# Altium PCB PCB.PcbDoc
Units mm, origin at the board's own origin, x right, y up, seen from the top; angles counter-clockwise.
Board outline 80 x 60 mm, 2 copper layers (Top Layer, Bottom Layer), stack 1.671 mm thick; 9 components, 7 nets, 24 pads, 2 vias.
Unrouted connection lines stored in the file: 1.
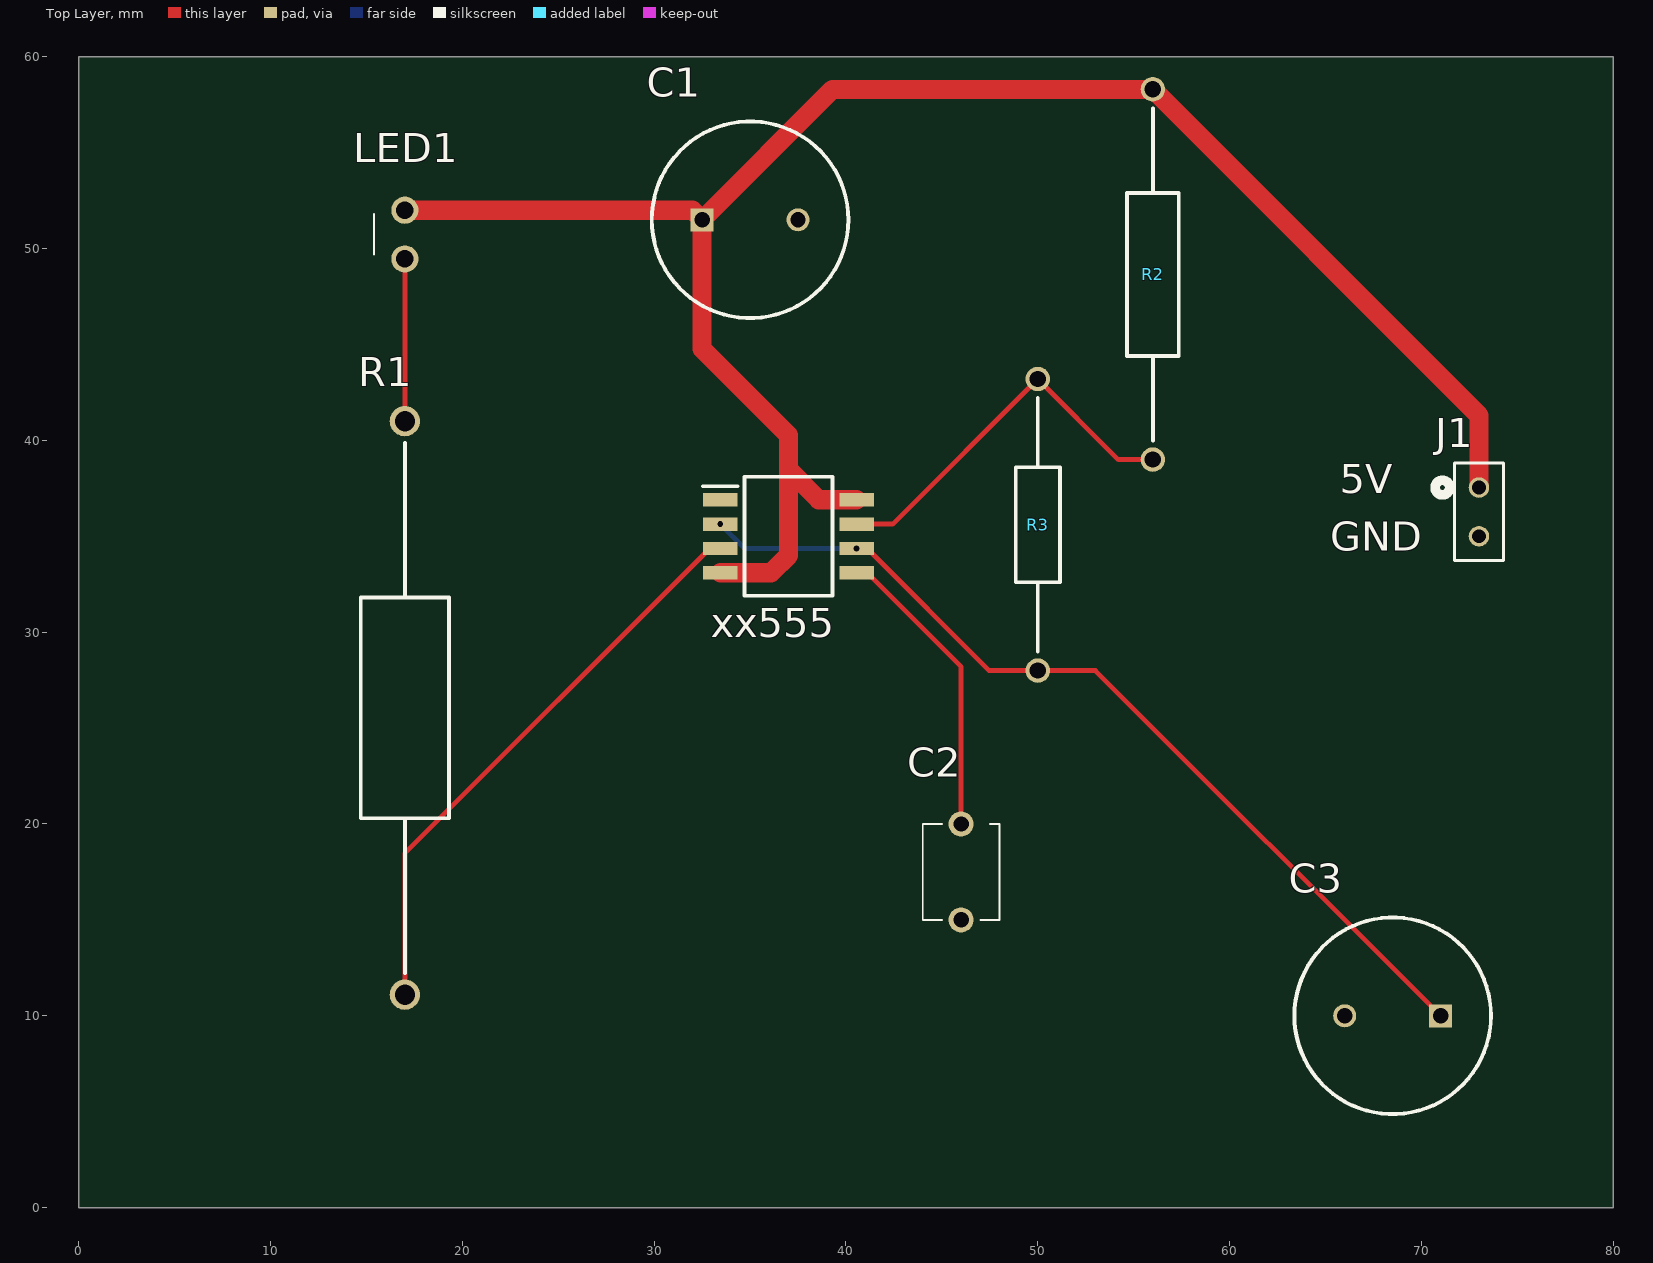
[diagram p0: Top Layer view]
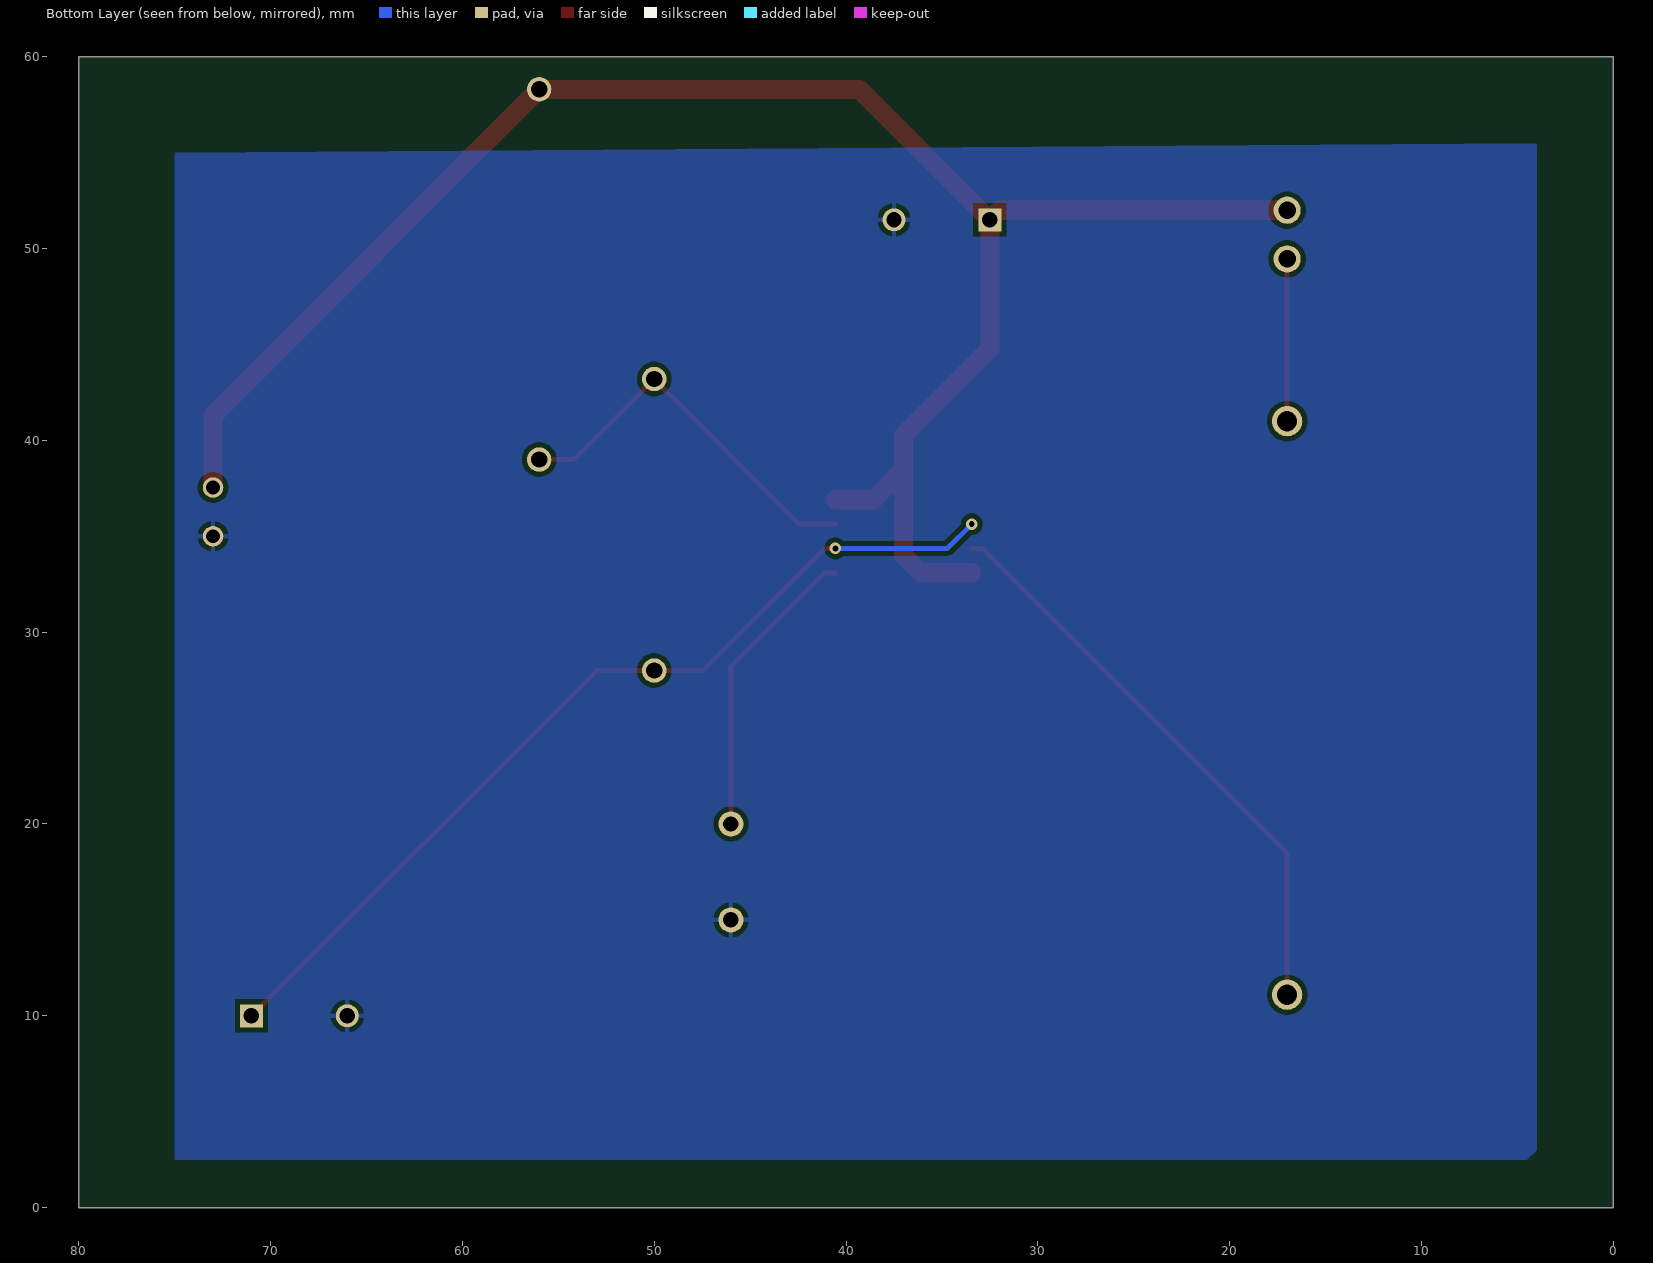
[diagram p1: Bottom Layer view, seen from below]
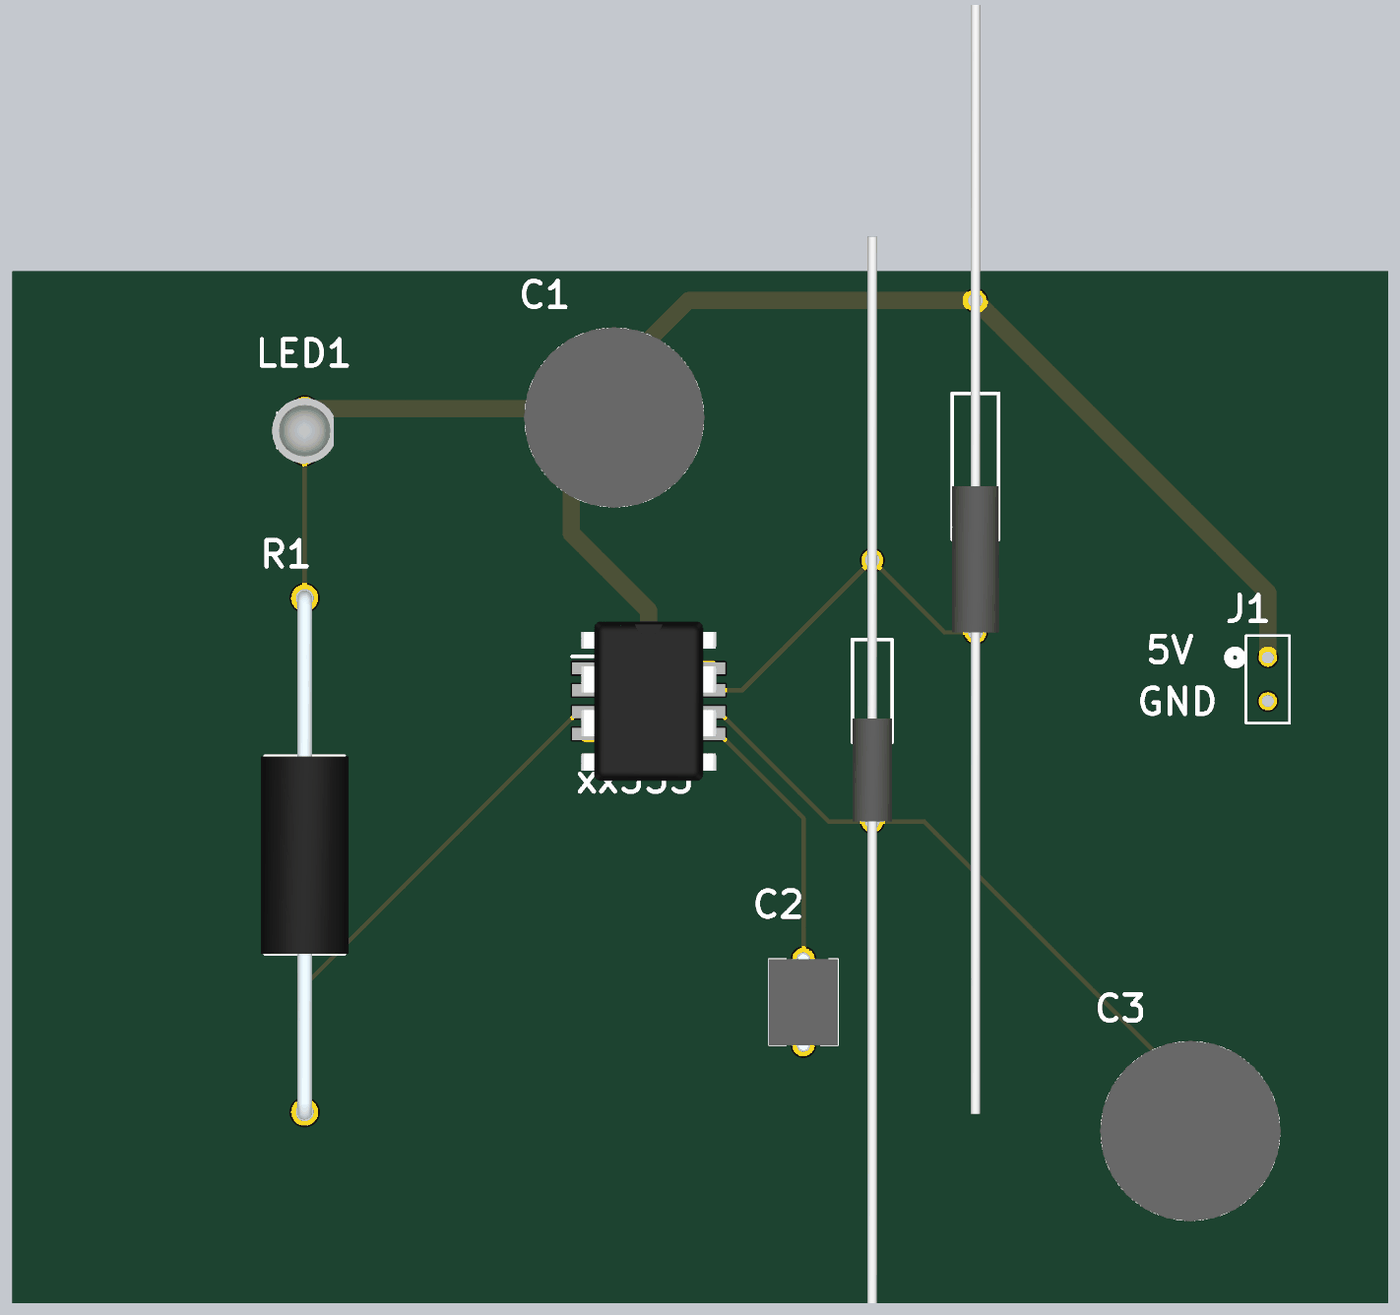
[diagram p2: 3D render of the assembled board from above, using the file's embedded part models]

## Layer stack, top to bottom
Top Solder: solder mask 0.0102, Solder Resist, Dk 3.5
Top Layer: signal copper 0.0356
Dielectric 1: dielectric 1.6, FR-4, Dk 4.8
Bottom Layer: signal copper 0.0356
Bottom Solder: solder mask 0.0102, Solder Resist, Dk 3.5

## Board outline
0,60 0,0 80,0 80,60

## Design rules (kind name [scope] priority, off if disabled: settings)
Clearance [All] p1: gap=0.254 ignorepadtopadclearanceinfootprint=FALSE except(0: Arc-Hole Track-Hole SMDPad-Hole THPad-Hole Via-Hole Fill-Hole Poly-Hole Region-Hole Text-Hole)
PolygonConnect [All] p1: connectstyle=Relief reliefconductorwidth=0.254 reliefentries=4 polygonreliefangle="90 Angle" airgapwidth=0.254
RoutingVias [All] p1: holewidth=0.711 width=1.27 viastyle="Through Hole" minholewidth=0.711 minwidth=1.27 maxholewidth=0.711 maxwidth=1.27
SolderMaskExpansion [All] p1: expansion=0.102 istentingtop=FALSE
Width [All] p1: maxlimit=0.254 minlimit=0.254 preferedwidth=0.254
30 further rules are at their usual default settings.

## Components (designator, comment, footprint, x,y, rotation, side; value= is the part's Value field where it differs from the comment)
C1 "UCS2G100MPD1TD" CAPPRD500W60D1025H2150 32.5,51.5 r0 top
C2 "D102K20Y5PH63J5R" D102K20Y5PH63J5R 46,15 r90 top
C3 "UCS2G100MPD1TD" CAPPRD500W60D1025H2150 71,10 r180 top
J1 "TS-102-T-A" SAMTEC_TS-102-T-A 73,37.54 r270 top
LED1 "1254-10SURT_S530-A3" 125410SURTS530A3 17,52 r270 top
R1 "PNP300JR-73-100R" RESAD2990W85L1150D460 17,11.1 r90 top
R2 "CF12JT1K00" RESAD1930W63L850D270 56,39 r90 top
R3 "CF14JT22K0" RESAD1520W63L600D230 50,28 r90 top
xx555 "NE555PSRE4" SOIC127P780X200-8N 37,35 r0 top

## Footprints (in the part's own frame and the unit in brackets; to place one, negate y for a bottom-side part, rotate by r counter-clockwise, add the part's x,y. Pads: shape width x height; smd on the part's side, far side on the other; paste and mask are expansions set on the pad)
125410SURTS530A3 [mm]
  round 1.416 hole 0.91: 1(0,0) 2(2.54,0)
  silkscreen extent 0.2,-1.6 2.3,-1.6, body extent -0.63,-1.9 3.17,1.7, height 5.28
CAPPRD500W60D1025H2150 [mm]
  rect 1.2x1.2 hole 0.8: 1(0,0)
  round 1.2 hole 0.8: 2(5,0)
  silkscreen extent -2.63,-5.12 7.63,5.12, body extent -2.75,-5.24 7.75,5.24, height 21.5
D102K20Y5PH63J5R [mm]
  round 1.3 hole 0.8: 1(0,0) 2(5,0)
  silkscreen extent 0,-2 5,2, body extent -0.3,-2 5.3,2, height 9.1
RESAD1520W63L600D230 [mm]
  round 1.275 hole 0.85: 1(0,0) 2(15.2,0)
  silkscreen extent 0.99,-1.15 14.21,1.15, body extent -28,-1.15 34,1.15, height 1.14
RESAD1930W63L850D270 [mm]
  round 1.275 hole 0.85: 1(0,0) 2(19.3,0)
  silkscreen extent 0.99,-1.35 18.31,1.35, body extent -28,-1.35 36.5,1.35, height 1.34
RESAD2990W85L1150D460 [mm]
  round 1.575 hole 1.05: 1(0,0) 2(29.9,0)
  silkscreen extent 1.14,-2.3 28.76,2.3, body extent -0.43,-2.55 30.32,2.55, height 5.1
SAMTEC_TS-102-T-A [mil]
  round 42 hole 28: 1(0,0) 2(100,0)
  silkscreen extent -50,-90 150,50
SOIC127P780X200-8N [mm]
  rect 1.8x0.7 smd: 1(-3.55,1.905) 2(-3.55,0.635) 3(-3.55,-0.635) 4(-3.55,-1.905) 5(3.55,-1.905) 6(3.55,-0.635) 7(3.55,0.635) 8(3.55,1.905)
  silkscreen extent -4.45,-3.1 2.3,3.1, body extent -4.1,-4.64 4.1,4.64, height 4.21

## Part data
C1 C3: "Capacitor Polarised", Manufacturer_Name=Nichicon, Mouser Part Number=647-UCS2G100MPD1TD, Arrow Part Number=UCS2G100MPD1TD, Arrow Price/Stock=https://www.arrow.com/en/products/ucs2g100mpd1td/nichicon, Datasheet Link=http://nichicon-us.com/english/products/pdfs/e-ucs.pdf, Height=21.5mm, Manufacturer_Part_Number=UCS2G100MPD1TD, Mouser Price/Stock=https://www.mouser.co.uk/ProductDetail/Nichicon/UCS2G100MPD1TD?qs=qJYTfuAnAfodP803qrfaZA%3D%3D
C2: "Capacitor", Manufacturer_Name=Vishay, Mouser Part Number=594-D102K20Y5PH63J5R, Arrow Part Number=D102K20Y5PH63J5R, Arrow Price/Stock=https://www.arrow.com/en/products/d102k20y5ph63j5r/vishay, Datasheet Link=https://componentsearchengine.com/Datasheets/2/D102K20Y5PH63J5R.pdf, Height=9mm, Manufacturer_Part_Number=D102K20Y5PH63J5R, Mouser Price/Stock=https://www.mouser.co.uk/ProductDetail/Vishay-BC-Components/D102K20Y5PH63J5R?qs=4byTeOu1NPHpy4BomGS2Ig%3D%3D
J1: "Connector", Manufacturer_Name=SAMTEC, Mouser Part Number=200-TS102TA, Arrow Part Number=TS-102-T-A, Arrow Price/Stock=https://www.arrow.com/en/products/ts-102-t-a/samtec?region=nac, Manufacturer_Part_Number=TS-102-T-A, Mouser Price/Stock=https://www.mouser.co.uk/ProductDetail/Samtec/TS-102-T-A?qs=0lQeLiL1qyYw%2F4U%252Bgf8JTQ%3D%3D
LED1: "LED", Arrow Part Number=1254-10SURT/S530-A3, Manufacturer_Name=Everlight, Arrow Price/Stock=https://www.arrow.com/en/products/1254-10surts530-a3/everlight-electronics?region=nac, Datasheet Link=https://datasheet.datasheetarchive.com/originals/distributors/Datasheets-3/DSA-55877.pdf, Height=5.2mm, Manufacturer_Part_Number=1254-10SURT/S530-A3
R1: "Resistor", Manufacturer_Name=KEMET, Mouser Part Number=603-PNP300JR-73-100R, Arrow Part Number=PNP300JR-73-100R, Arrow Price/Stock=https://www.arrow.com/en/products/pnp300jr-73-100r/yageo, Datasheet Link=https://www.yageo.com/upload/media/product/productsearch/datasheet/lr/YAGEO%20PNP_datasheet_2021v0.pdf, Manufacturer_Part_Number=PNP300JR-73-100R, Mouser Price/Stock=https://www.mouser.com/Search/Refine.aspx?Keyword=603-PNP300JR-73-100R
R2: "Resistor", Manufacturer_Name="Stackpole Electronics", Mouser Part Number=708-CF12JT1K00, Datasheet Link=https://cs.seielect.com/catalog/SEI-CF_CFM.pdf, Manufacturer_Part_Number=CF12JT1K00, Mouser Price/Stock=https://www.mouser.co.uk/ProductDetail/SEI-Stackpole/CF12JT1K00?qs=FESYatJ8odK%252BPjfs7xH%2FCA%3D%3D
R3: "Resistor", Manufacturer_Name="Stackpole Electronics", Arrow Part Number=CF14JT22K0, Arrow Price/Stock=https://www.arrow.com/en/products/cf14jt22k0/stackpole-electronics, Datasheet Link=https://cs.seielect.com/catalog/SEI-CF_CFM.pdf, Manufacturer_Part_Number=CF14JT22K0
xx555: "Integrated Circuit", Manufacturer_Name="Texas Instruments", Mouser Part Number=595-NE555PSRE4, Arrow Part Number=NE555PSRE4, Arrow Price/Stock=https://www.arrow.com/en/products/ne555psre4/texas-instruments, Datasheet Link=http://www.ti.com/lit/ds/symlink/ne555.pdf, Height=2mm, Manufacturer_Part_Number=NE555PSRE4, Mouser Price/Stock=https://www.mouser.co.uk/ProductDetail/Texas-Instruments/NE555PSRE4?qs=rLYyFdxB%2FmqTKEcMFJ%252BBIw%3D%3D

## Via types
v1: diameter 0.6, hole 0.3, Top Layer to Bottom Layer, tented both sides, 2 vias

## Nets (pads, with @x,y where several pads share a name; then routed paths per layer and width w, separated by ;. In a path a pad name is that pad's centre, name@x,y a point inside that pad or via, vN(x,y) a via of type N, cw(c..) or ccw(c..) an arc to the next point about the centre after c; other vN are vias at no path point)
5V: C1.1 J1.1 LED1.1 R2.2 xx555.4 xx555.8 | length 97.3
  Top Layer w1: LED1.1 32,52 C1.1 ; xx555.4 36.095,33.095 37,34 37,38.48 ; xx555.8 38.575,36.905 37,38.48 ; J1.1 73,41.3 R2.2 39.3,58.3 C1.1 ; C1.1 32.5,44.763 37,40.263 37,38.48
GND: C1.2 C2.1 C3.2 J1.2 xx555.1
NetC2_2: C2.2 xx555.5 | length 15.7
  Top Layer w0.254: xx555.5 41.1,33.095 46,28.195 C2.2
NetC3_1: C3.1 R3.1 xx555.2 xx555.6 | length 48.2
  Top Layer w0.254: v1(40.55,34.365) 41.1,34.365 47.465,28 R3.1 53,28 C3.1
  Bottom Layer w0.254: v1(33.45,35.635) 34.72,34.365 v1(40.55,34.365)
NetLED1_2: LED1.2 R1.2 | length 8.5
  Top Layer w0.254: R1.2 LED1.2
NetR1_1: R1.1 xx555.3 | length 30.4
  Top Layer w0.254: R1.1 17,18.465 32.9,34.365 xx555.3
NetR2_1: R2.1 R3.2 xx555.7 | length 20.3
  Top Layer w0.254: xx555.7 42.435,35.635 R3.2 54.2,39 R2.1

## Polygon pours and split planes (outlines as drawn)
GND on Bottom Layer "GND_L02_P001" (solid, pour order 1): 75,55 75,2.5 4.5,2.5 4,3 4,55.5

## Silkscreen, mask and mechanical layers (free items; w line width, h text height)
Top Overlay:
  text "5V" at 65.754,37.254 h1.52
  text "GND" at 65.254,34.254 h1.52